# Altium PCB PCB2.PcbDoc
Units mil, origin at the board's own origin, x right, y up, seen from the top; angles counter-clockwise.
Board outline 6000 x 4000 mil, 2 copper layers (Top Layer, Bottom Layer); 42 components, 41 nets, 123 pads, 10 vias.
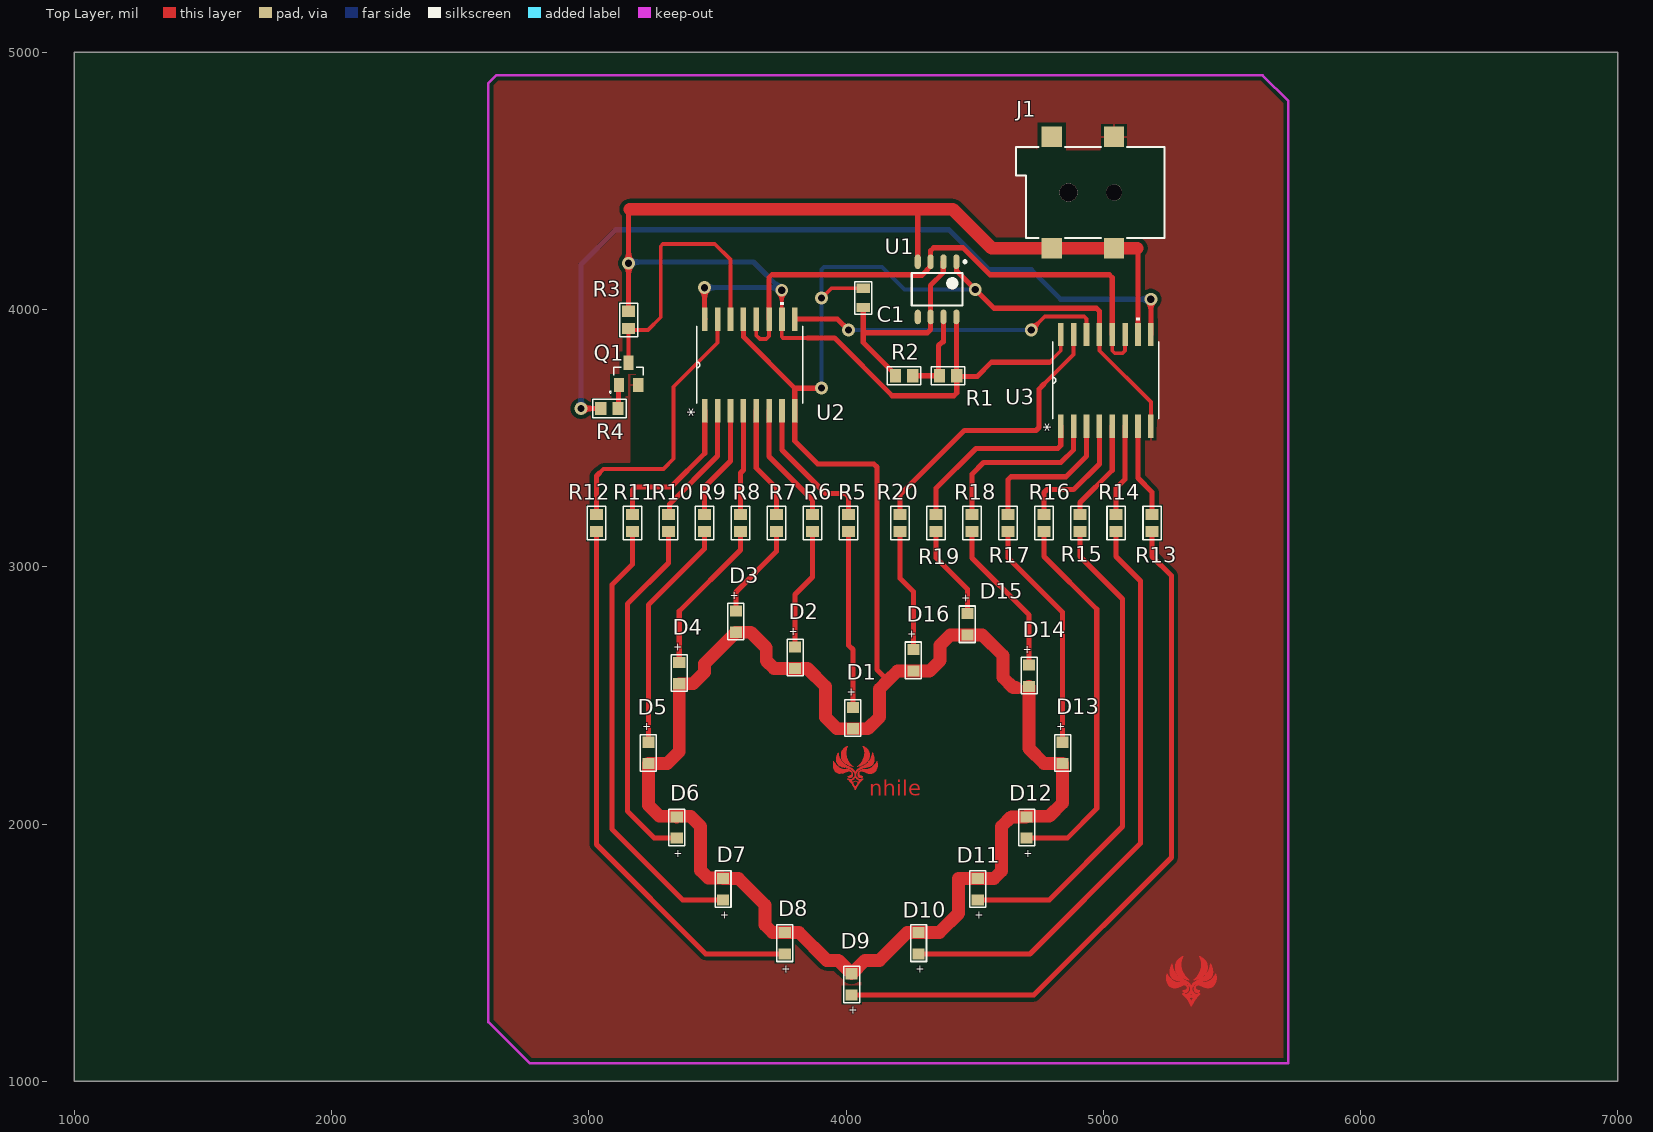
[diagram p0: Top Layer view]
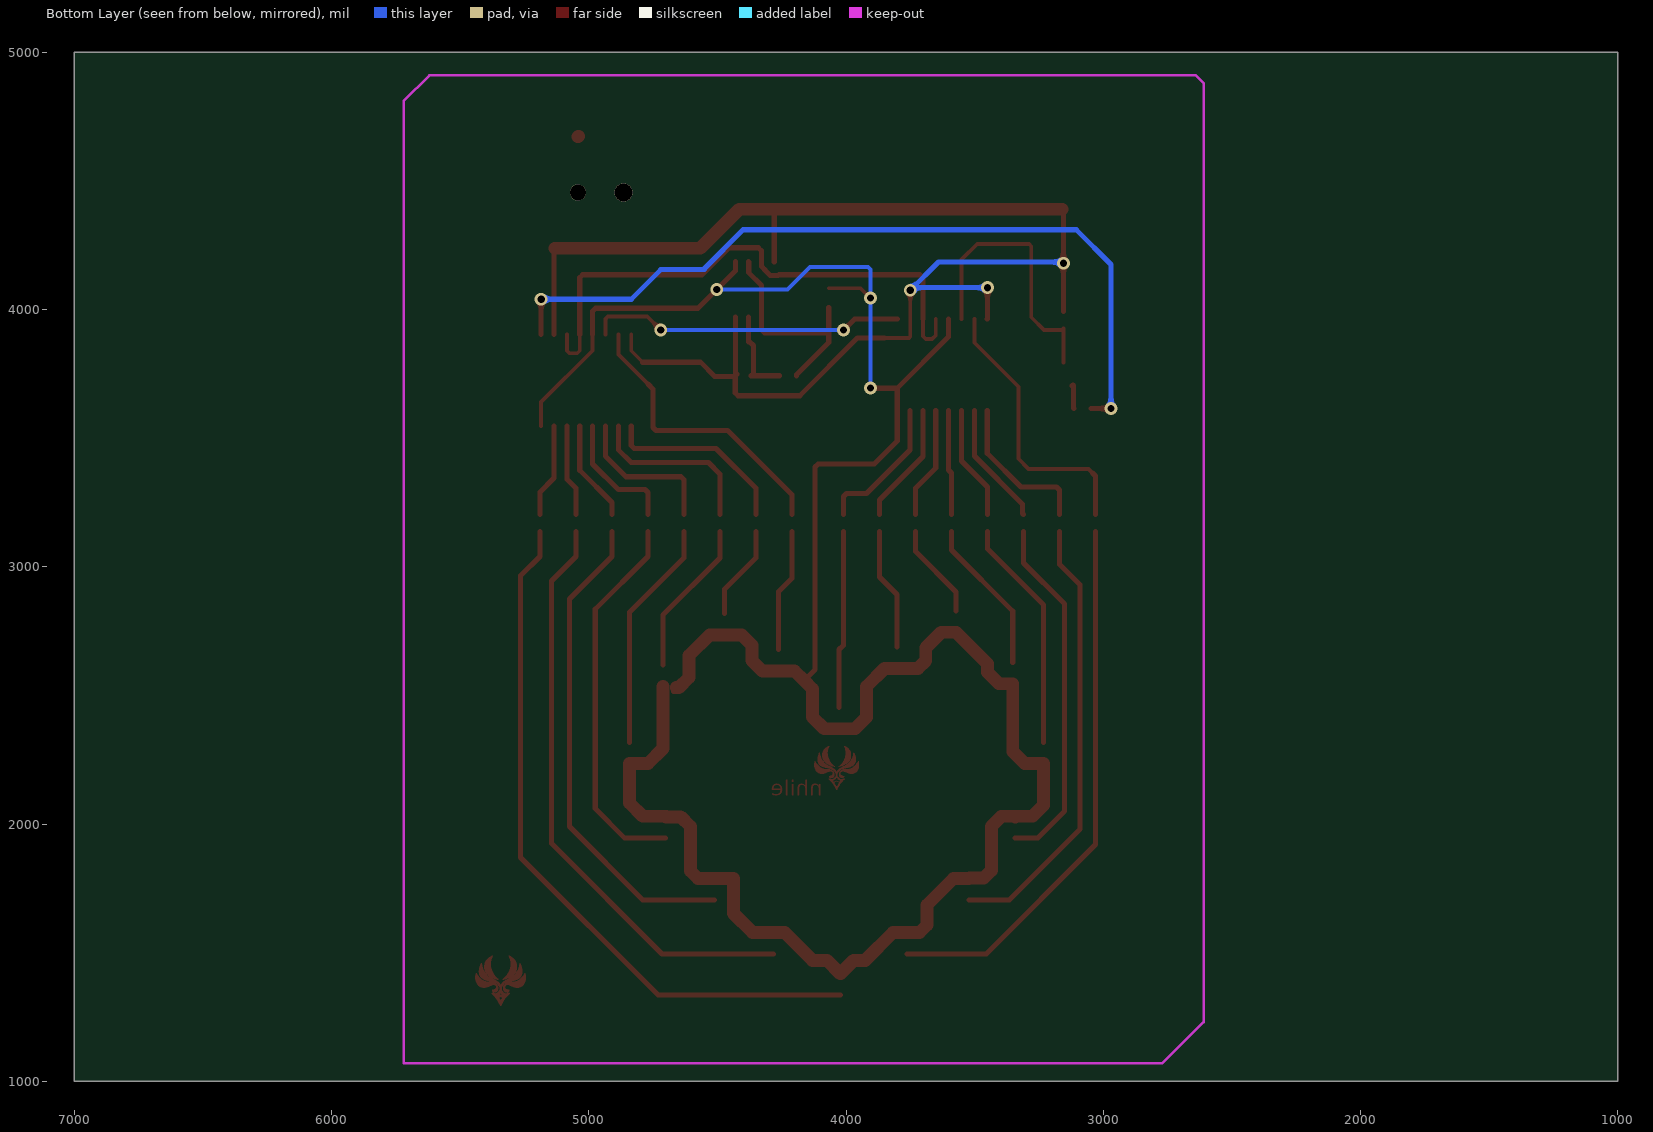
[diagram p1: Bottom Layer view, seen from below]
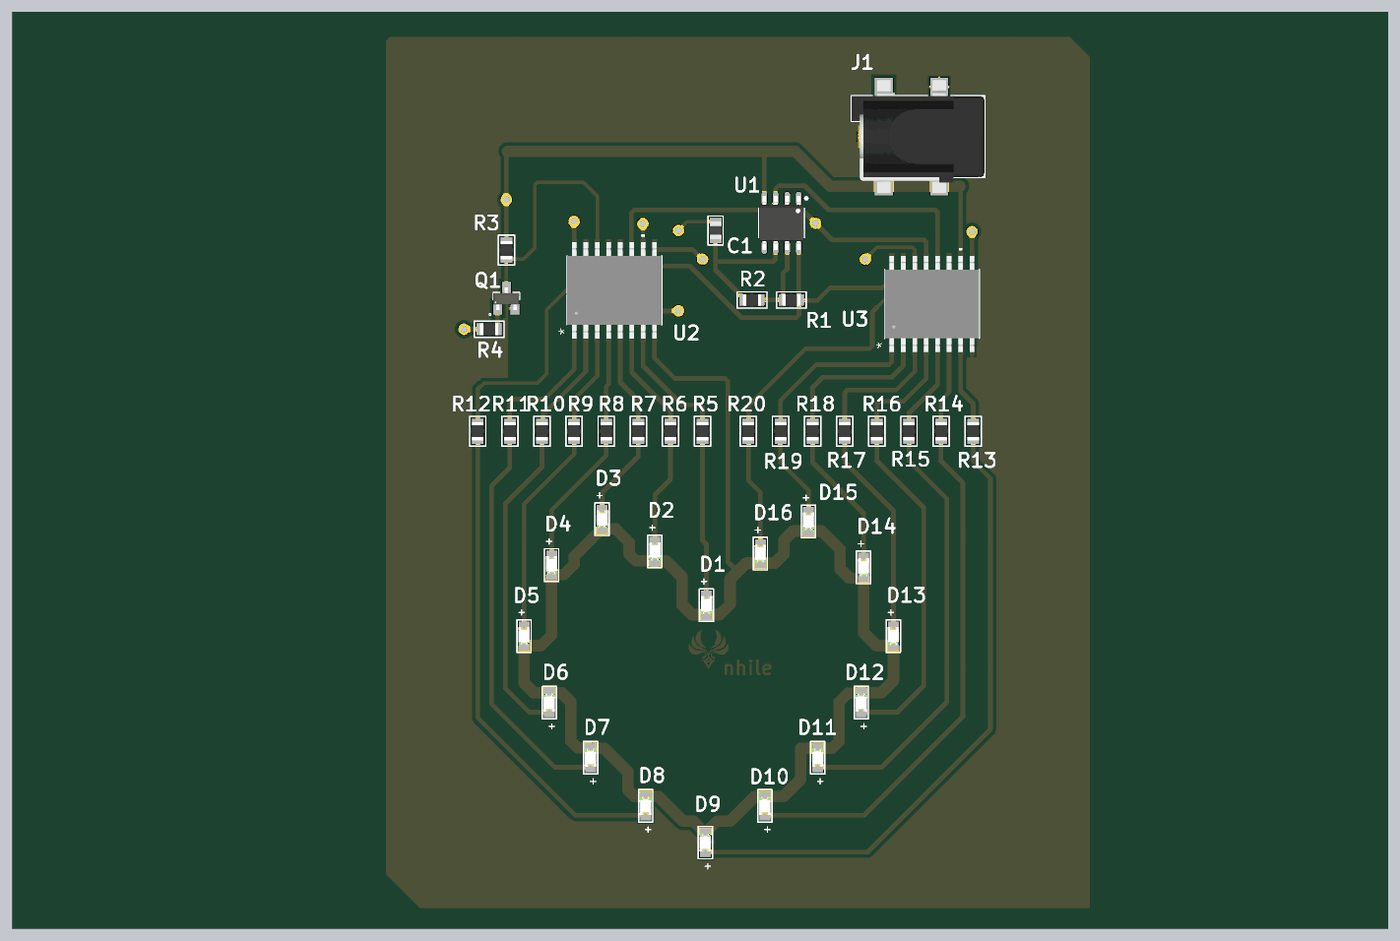
[diagram p2: 3D render of the assembled board from above, using the file's embedded part models]

## Layer stack, top to bottom
Top Solder: solder mask 0.4, Solder Resist, Dk 3.5
Top Layer: signal copper 1.4
Dielectric 1: dielectric 12.6, FR-4, Dk 4.8
Bottom Layer: signal copper 1.4
Bottom Solder: solder mask 0.4, Solder Resist, Dk 3.5

## Board outline
1000,1000 7000,1000 7000,5000 1000,5000

## Design rules (kind name [scope] priority, off if disabled: settings)
Clearance [All] p1: gap=15 ignorepadtopadclearanceinfootprint=FALSE
PolygonConnect [All] p1: connectstyle=Relief reliefconductorwidth=10 reliefentries=4 polygonreliefangle="90 Angle" airgapwidth=10
RoutingVias [All] p1: holewidth=0.8 width=1.5 viastyle="Through Hole" minholewidth=0.8 minwidth=1.5 maxholewidth=0.8 maxwidth=1.5
SolderMaskExpansion [All] p1: expansion=4 istentingtop=FALSE
Width [All] p1: maxlimit=50 minlimit=15 preferedwidth=20
30 further rules are at their usual default settings.

## Components (designator, comment, footprint, x,y, rotation, side; value= is the part's Value field where it differs from the comment)
C1 "10 uF, 25 VDC" CAP_0805 4066,4046.54 r90 top
D1 "Blue, 3.2V" WL-SMCW_0805 4027,2411.54 r90 top
D2 "Blue, 3.2V" WL-SMCW_0805 3802,2646.54 r90 top
D3 "Blue, 3.2V" WL-SMCW_0805 3572,2786.54 r90 top
D4 "Blue, 3.2V" WL-SMCW_0805 3352,2586.54 r90 top
D5 "Blue, 3.2V" WL-SMCW_0805 3232,2276.54 r90 top
D6 "Blue, 3.2V" WL-SMCW_0805 3342,1986.54 r270 top
D7 "Blue, 3.2V" WL-SMCW_0805 3522,1746.54 r270 top
D8 "Blue, 3.2V" WL-SMCW_0805 3762,1536.54 r270 top
D9 "Blue, 3.2V" WL-SMCW_0805 4022,1376.54 r270 top
D10 "Blue, 3.2V" WL-SMCW_0805 4282,1536.54 r270 top
D11 "Blue, 3.2V" WL-SMCW_0805 4512,1746.54 r270 top
D12 "Blue, 3.2V" WL-SMCW_0805 4702,1986.54 r270 top
D13 "Blue, 3.2V" WL-SMCW_0805 4842,2276.54 r90 top
D14 "Blue, 3.2V" WL-SMCW_0805 4712,2576.54 r90 top
D15 "Blue, 3.2V" WL-SMCW_0805 4472,2776.54 r90 top
D16 "Blue, 3.2V" WL-SMCW_0805 4262,2636.54 r90 top
J1 "DC050" DC050 4915,4455 r0 top
Q1 "MMBTA42" MMBT-SOT23 3155,3750 r0 top
R1 "1 KOhm, 1/8 W" RESISTOR_0805 4397,3742.54 r0 top
R2 "1 KOhm, 1/8 W" RESISTOR_0805 4226,3742.54 r0 top
R3 "1 MOhm, 1/8 W" RESISTOR_0805 3155,3960 r90 top
R4 "1 MOhm, 1/8 W" RESISTOR_0805 3080,3615 r180 top
R5 "1K, 1/8W" RESISTOR_0805 4010,3170 r270 top value="1 KOhm, 1/8 W"
R6 "1K, 1/8W" RESISTOR_0805 3870,3170 r90 top value="1 KOhm, 1/8 W"
R7 "1K, 1/8W" RESISTOR_0805 3730,3170 r90 top value="1 KOhm, 1/8 W"
R8 "1K, 1/8W" RESISTOR_0805 3590,3170 r90 top value="1 KOhm, 1/8 W"
R9 "1K, 1/8W" RESISTOR_0805 3450,3170 r90 top value="1 KOhm, 1/8 W"
R10 "1K, 1/8W" RESISTOR_0805 3310,3170 r90 top value="1 KOhm, 1/8 W"
R11 "1K, 1/8W" RESISTOR_0805 3170,3170 r90 top value="1 KOhm, 1/8 W"
R12 "1K, 1/8W" RESISTOR_0805 3030,3170 r90 top value="1 KOhm, 1/8 W"
R13 "1K, 1/8W" RESISTOR_0805 5190,3170 r90 top value="1 KOhm, 1/8 W"
R14 "1K, 1/8W" RESISTOR_0805 5050,3170 r90 top value="1 KOhm, 1/8 W"
R15 "1K, 1/8W" RESISTOR_0805 4910,3170 r90 top value="1 KOhm, 1/8 W"
R16 "1K, 1/8W" RESISTOR_0805 4770,3170 r90 top value="1 KOhm, 1/8 W"
R17 "1K, 1/8W" RESISTOR_0805 4630,3170 r90 top value="1 KOhm, 1/8 W"
R18 "1K, 1/8W" RESISTOR_0805 4490,3170 r90 top value="1 KOhm, 1/8 W"
R19 "1K, 1/8W" RESISTOR_0805 4350,3170 r90 top value="1 KOhm, 1/8 W"
R20 "1K, 1/8W" RESISTOR_0805 4210,3170 r90 top value="1 KOhm, 1/8 W"
U1 "LM555CMX" LM555CMX 4354,4078.54 r270 top
U2 "SN74HC595DWR" DW16 3626,3784.54 r90 top
U3 "SN74HC595DWR" DW16 5010,3725 r90 top

## Footprints (in the part's own frame and the unit in brackets; to place one, negate y for a bottom-side part, rotate by r counter-clockwise, add the part's x,y. Pads: shape width x height; smd on the part's side, far side on the other; paste and mask are expansions set on the pad)
CAP_0805 [mm]
  rect 0.9x1.3 smd: 1(-0.975,-0.025) 2(0.925,-0.025)
  silkscreen extent -1.63,-0.86 1.57,0.81, body extent -1.03,-0.65 0.97,0.6, height 0.6
DC050 [mm]
  rect 2x2 smd: 1(-2.92,-5.5) 1(3.23,-5.5) 2(3.23,5.5) 3(-2.92,5.5)
  round 1.6 hole 1.6 unplated: MH1(3.23,0)
  round 1.8 hole 1.8 unplated: MH2(-1.27,0)
  silkscreen extent -6.47,-4.5 8.23,4.5, body extent -6.47,-6.25 8.23,6.25, height 11.05
DW16 [mil]
  rect 91x22 smd paste-45.5 mask-45.5: 1(-178,175) 2(-178,125) 3(-178,75) 4(-178,25) 5(-178,-25) 6(-178,-75) 7(-178,-125) 8(-178,-175) 9(178,-175) 10(178,-125) 11(178,-75) 12(178,-25) 13(178,25) 14(178,75) 15(178,125) 16(178,175)
  silkscreen extent -150,-206 244,206, body extent -209,-206 209,206, height 104
LM555CMX [mm] "SOIC, 8-Leads, Body 4.91x3.90mm, Pitch 1.27mm, IPC Medium Density"
  oval 1.45x0.6 smd: 1(-2.725,1.905) 2(-2.725,0.635) 3(-2.725,-0.635) 4(-2.725,-1.905) 5(2.725,-1.905) 6(2.725,-0.635) 7(2.725,0.635) 8(2.725,1.905)
  silkscreen extent -2.85,-2.5 1.6,2.88, body extent -3,-2.5 3,2.5, height 1.35
MMBT-SOT23 [mm]
  rect 1x1.4 smd: 1(-0.95,-1.1) 2(0,1.1) 3(0.95,-1.1)
  silkscreen extent -1.9,-1.9 1.45,0.65, body extent -1.45,-1.3 1.45,1.2, height 1.1
RESISTOR_0805 [mm] "Chip Resistor, 2-Leads, Body 2,00x1,20mm, IPC Medium Density"
  rect 1.1x1.3 smd: 1(-0.85,0) 2(0.85,0)
  silkscreen extent -1.65,-0.9 1.65,0.9, body extent -1,-0.65 1,0.65, height 0.45
WL-SMCW_0805 [mm] "SMD Mono-color Chip LED, body 2.0x1.25mm"
  rect 1.1x1.2 smd: 1(-1.05,0) 2(1.05,0)
  silkscreen extent -1.8,-0.79 1.8,0.79, body extent -1,-0.63 1,0.62, height 0.7

## Part data
C1: library part 0108051061025, "CAP, size 0805, 10 uF, 25 VDC", Capacitance="10 uF", Manufacture Name=TDK, Manufacture SN=CGA4J1X7S1E106K125AE, Operating Temperature="-55 to +125degC", Tolerance=+/-10%, Voltage Rating DC="25 VDC", ComponentLink2Description=Datasheet, ComponentLink2URL=https://product.tdk.com/system/files/dam/doc/product/capacitor/ceramic/mlcc/catalog/mlcc_automotive_soft_en.pdf?ref_disty=mouser, Mounting Technology=SMT, Packaging="Tape and Reel", Size=0805, Supplier 1 Name=Mouser, Supplier 1 SN=810-CGA4J1X7S1E106K2, Supplier 1 URL=https://www.mouser.vn/ProductDetail/TDK/CGA4J1X7S1E106K125AE?qs=PqoDHHvF64%252BJvhmUzM2odA%3D%3D&utm_source=mouser-refine-download&utm_medium=file&utm_campaign=CGA4J1X7S1E106K125AE&utm_content=TDK, Supplier 2 Name=Digi-Key, Supplier 2 SN=445-181411-2-ND, Supplier 2 URL=https://www.digikey.com/en/products/detail/tdk-corporation/cga4j1x7s1e106k125ae/9744777, Supplier 3 Name=thegioiic, Supplier 3 SN=OEM, Supplier 3 URL=N/A
D1 D2 D3 D4 D5 D6 D7 D8 D9 D10 D11 D12 D13 D14 D15 D16: library part 160805BlueClear, "WL-SMCW SMT Mono-color Chip LED Waterclear, size 0805, Blue, 3.2V, 140deg", Color=Blue, ComponentLink1Description="Datasheet link", ComponentLink1URL=N/A, ComponentLink2Description="Supplier 1 URL", ComponentLink2URL=https://www.mouser.vn/ProductDetail/Wurth-Elektronik/150080BS75000?qs=2kOmHSv6VfT2tBo3UPVqAQ%3D%3D, ComponentLink3Description="Supplier 2 URL", ComponentLink3URL=https://www.digikey.com/en/products/detail/liteon/LTST-C170TBKT/388527, ComponentLink4Description="Supplier 3 URL", ComponentLink4URL=https://www.thegioiic.com/led-xanh-duong-0805-dan-smd-trong-suot-harvatek, Size=0603, Supplier 1 Name=Mouser, Supplier 1 SN=710-150080BS75000, Supplier 1 URL=https://www.mouser.vn/ProductDetail/Wurth-Elektronik/150080BS75000?qs=2kOmHSv6VfT2tBo3UPVqAQ%3D%3D, Supplier 2 Name=Digi-Key, Supplier 2 SN=160-1579-2-ND, Supplier 2 URL=https://www.digikey.com/en/products/detail/liteon/LTST-C170TBKT/388527, Supplier 3 Name=ICDayRoi, Supplier 3 SN=N/A, Supplier 3 URL=https://www.thegioiic.com/led-xanh-duong-0805-dan-smd-trong-suot-harvatek, Type=Clear
J1: Manufacturer=OEM, Manufacturer Part Number=N/A, Rated Current=2.5A, Working Voltage=16V, ComponentLink1Description="Datasheet link", ComponentLink1URL=N/A, ComponentLink2Description="Supplier 1 URL", ComponentLink2URL=N/A, ComponentLink3Description="Supplier 2 URL", ComponentLink3URL=N/A, ComponentLink4Description="Supplier 3 URL", ComponentLink4URL=https://www.thegioiic.com/dc050-dau-noi-nguon-dc-cai-5521-dan-smd-kim-2-1mm, Mount=SMD, Number of Pins=4, Operating Temperature Max=N/A, Operating Temperature Min=N/A, Orientation=N/A, Packaging=N/A, Supplier 1 Name=Mouser, Supplier 1 SN=N/A, Supplier 1 URL=N/A, Supplier 2 Name=Digi-Key, Supplier 2 SN=N/A, Supplier 2 URL=N/A, Supplier 3 Name=thegioiic, Supplier 3 SN=DC050, Supplier 3 URL=https://www.thegioiic.com/dc050-dau-noi-nguon-dc-cai-5521-dan-smd-kim-2-1mm
Q1: "TRANS NPN, 300V, 0.5A, SOT23-3", Current - Collector=500mA, DC Current Gain=80-200, Package=SOT-23, Power Dissipation=250mW, Voltage - Collector Emitter Breakdown=300V, Gain Bandwidth Product fT=50MHz, Supplier 1 Name=Mouser, Supplier 1 SN=637-MMBTA42, Supplier 1 URL=https://www.mouser.vn/ProductDetail/Diotec-Semiconductor/MMBTA42?qs=OlC7AqGiEDkTSphcOD18pw%3D%3D, Supplier 2 Name=Digi-Key, Supplier 2 SN=2796-MMBTA42TR-ND, Supplier 2 URL=https://www.digikey.com/en/products/detail/diotec-semiconductor/MMBTA42/13163233, Supplier 3 Name=thegioiic, Supplier 3 SN=N/A, Supplier 3 URL=https://www.thegioiic.com/mmbta42-transistor-npn-300v-0-5a-3-chan-sot-23, Transistor Type=NPN
R1 R2 R5 R6 R7 R8 R9 R10 R11 R12 R13 R14 R15 R16 R17 R18 R19 R20: library part 0008051021, "RES, size 0805, 1 KOhm, 1/8 W", Manufacture  Name="Vishay Dale", Manufacture  SN=M55342K06B1E00RS3, Rated Power="1/8 W", Resistance="1 KOhm", Resistance tolerance=+/-1%, ComponentLink1Description="Datasheet link", ComponentLink1URL=https://www.vishay.com/docs/31010/rcwpm.pdf, ComponentLink2Description="Supplier 1 URL", ComponentLink2URL=N/A, ComponentLink3Description="Supplier 2 URL", ComponentLink3URL=https://www.digikey.com/en/products/detail/vishay-dale/M55342K06B1E00RS3/2941798, ComponentLink4Description="Supplier 3 URL", ComponentLink4URL=https://www.thegioiic.com/dien-tro-1-kohm-0805-1, Mounting Technology=SMT, Size=0805, Supplier 1 Name=Mouser, Supplier 1 SN=N/A, Supplier 1 URL=N/A, Supplier 2 Name=Digi-Key, Supplier 2 SN=1135-1001-2-ND, Supplier 2 URL=https://www.digikey.com/en/products/detail/vishay-dale/M55342K06B1E00RS3/2941798, Supplier 3 Name=Thegioiic, Supplier 3 SN=N/A, Supplier 3 URL=https://www.thegioiic.com/dien-tro-1-kohm-0805-1
R3 R4: library part 0008051051, "RES, size 0805, 1 MOhm, 1/8 W", Manufacture  Name="Vishay Dale", Manufacture  SN=M55342K06B1F00RS3, Rated Power="1/8 W", Resistance="1 MOhm", Resistance tolerance=+/-1%, ComponentLink1Description="Datasheet link", ComponentLink1URL=N/A, ComponentLink2Description="Supplier 1 URL", ComponentLink2URL=N/A, ComponentLink3Description="Supplier 2 URL", ComponentLink3URL=https://www.digikey.com/en/products/detail/vishay-dale/M55342K06B1F00RS3/2941807?s=N4IgjCBcoMxaBjKAzAhgGwM4FMA0IB7KAbXDBggF18AHAFyhAGU6AnASwDsBzEAX3xgAbPBBJIaLHkIkQMAJwwATPJDUQ9Riw49%2B%2BACwjoYlBhz4ikUgA4A7MrW0GkZmy68BIJQAZrAVlFxSXMZK3AAAgBZAHkACwBbTEcNZxAAVU52OmjkSOxUTABXVmx%2BPj4gA, ComponentLink4Description="Supplier 3 URL", ComponentLink4URL=https://www.thegioiic.com/dien-tro-1-mohm-0805-1, Mounting Technology=SMT, Size=0805, Supplier 1 Name=Mouser, Supplier 1 SN=N/A, Supplier 1 URL=N/A, Supplier 2 Name=Digi-Key, Supplier 2 SN=1135-1009-2-ND, Supplier 2 URL=https://www.digikey.com/en/products/detail/vishay-dale/M55342K06B1F00RS3/2941807?s=N4IgjCBcoMxaBjKAzAhgGwM4FMA0IB7KAbXDBggF18AHAFyhAGU6AnASwDsBzEAX3xgAbPBBJIaLHkIkQMAJwwATPJDUQ9Riw49%2B%2BACwjoYlBhz4ikUgA4A7MrW0GkZmy68BIJQAZrAVlFxSXMZK3AAAgBZAHkACwBbTEcNZxAAVU52OmjkSOxUTABXVmx%2BPj4gA, Supplier 3 Name=Thegioiic, Supplier 3 SN=N/A, Supplier 3 URL=https://www.thegioiic.com/dien-tro-1-mohm-0805-1
U1: "Timers & Support Products TIMER", LCSC Part #=N/A, Manufacturer="Texas Instruments", Manufacturer Part Number=LM555CMX/NOPB, Operating Temperature Max="+ 85 C", Operating Temperature Min="- 40 C", Package / Case=SOIC-8, Power Dissipation="1.18 W", Supplier 1 Part Number=926-LM555CMX/NOPB, Supplier 3 Part Number=NE555D, Supply Voltage - Max="4.5 V", Supply Voltage - Min="16 V", Active=Active, ComponentLink1Description=Datasheet, ComponentLink1URL=https://www.ti.com/lit/gpn/lm555, Mount=SMD/SMT, Number of Internal Timers=1, Packaging="Tape and Reel", Pad count=8, Supplier 1=Mouser, Supplier 1 URL=https://www.mouser.com/ProductDetail/Texas-Instruments/LM555CMX-NOPB?qs=QbsRYf82W3GHnQuoL%2FmIoA%3D%3D, Supplier 2=Digi-Key, Supplier 2 Part Number=N/A, Supplier 2 URL=N/A, Supplier 3=thegioiic, Supplier 3 URL=https://www.thegioiic.com/ne555d-ic-timer-circuit-100khz-8-soic
U2 U3: "No Description Available", Mfr_Name="Texas Instruments", RefDes=RefDes, Type=Type

## Via types
v1: diameter 50, hole 28, Top Layer to Bottom Layer, 10 vias

## Nets (pads, with @x,y where several pads share a name; then routed paths per layer and width w, separated by ;. In a path a pad name is that pad's centre, name@x,y a point inside that pad or via, vN(x,y) a via of type N, cw(c..) or ccw(c..) an arc to the next point about the centre after c; other vN are vias at no path point)
1: R12.2 U2.15 | length 1090.8
  Top Layer w15: 3041.72,3365 3056.72,3380 3290,3380 3330,3420 3330,3700 3501,3871 U2.15
  Top Layer w20: R12.2 3030,3353.28 3041.72,3365
2: R11.2 U2.1 | length 600.5
  Top Layer w20: R11.2 3170,3298.28 3181.72,3310 3320,3310 3451,3441 U2.1
3: R10.2 U2.2 | length 482.2
  Top Layer w20: R10.2 3313.4,3206.87 3313.4,3243.4 3501,3431 U2.2
4: R9.2 U2.3 | length 444.9
  Top Layer w20: R9.2 3450,3310 3551,3411 U2.3
5: R8.2 U2.4 | length 407.6
  Top Layer w20: R8.2 3590,3365 3601,3376 U2.4
6: R7.2 U2.5 | length 435.8
  Top Layer w20: U2.5 3651,3384 3730,3305 R7.2
7: R6.2 U2.6 | length 473.1
  Top Layer w20: U2.6 3701,3429 3870,3260 R6.2
8: R5.1 U2.7 | length 556.2
  Top Layer w20: U2.7 3751,3454 3920,3285 3998.28,3285 4010,3273.28 R5.1
9: R20.2 U3.15 | length 1142.1
  Top Layer w15: 4770,3710 4885,3825 U3.15
  Top Layer w20: R20.2 4210,3280 4460,3530 4738.28,3530 4750,3541.72 4750,3690 4770,3710
10: R19.2 U3.1 | length 730.9
  Top Layer w20: R19.2 4350,3305 4505,3460 4823.28,3460 4835,3471.72 U3.1
11: R18.2 U3.2 | length 682.9
  Top Layer w20: R18.2 4490,3360 4535,3405 4835,3405 4885,3455 U3.2
12: R17.2 U3.3 | length 594.8
  Top Layer w20: R17.2 4630,3338.28 4641.72,3350 4855,3350 4935,3430 U3.3
13: R16.2 U3.4 | length 493.1
  Top Layer w20: R16.2 4770,3288.28 4781.72,3300 4885,3300 4985,3400 U3.4
14: R15.2 U3.5 | length 395.3
  Top Layer w20: R15.2 4910,3250 5035,3375 U3.5
15: R14.2 U3.6 | length 358
  Top Layer w20: R14.2 5050,3305 5085,3340 U3.6
16: R13.2 U3.7 | length 366.3
  Top Layer w20: U3.7 5135,3345 5190,3290 R13.2
555: U1.3 U2.11 U2.12 U3.11 U3.12 | length 2226
  Top Layer w15: U2.12 3651,3899 3665,3885 3690,3885 3701,3896 U2.11 ; U3.12 5035,3840 5045,3830 5075,3830 5085,3840 U3.11
  Top Layer w20: U2.11 3700,3963.54 3700,4123.28 3711.72,4135 4261.03,4135 4263.75,4132.28 4294.25,4132.28 4315.81,4153.84 4315.81,4154.92 4329,4168.11 U1.3 4329,4228.28 4340.72,4240 4455,4240 4560,4135 5023.28,4135 5035,4123.28 U3.12
GND: C1.2 D1.1 D2.1 D3.1 D4.1 D5.1 D6.1 D7.1 D8.1 D9.1 D10.1 D11.1 D12.1 D13.1 D14.1 D15.1 D16.1 J1.2 Q1.3 U1.1 U2.8 U2.13 U3.8 U3.13 | length 22524.5
  Top Layer w1: 5244,1399 5263,1399 ; 5244,1400 5262,1400 ; 5244,1401 5261,1401 ; 5244,1402 5260,1402 ; 5244,1403 5259,1403 ; 5244,1404 5258,1404 ; 5244,1405 5257,1405 ; 5244,1406 5256,1406 ; 5244,1407 5256,1407 ; 5244,1408 5255,1408 ; 5245,1393 5270,1393 ; 5245,1394 5268,1394 ; 5245,1395 5267,1395 ; 5245,1396 5266,1396 ; 5245,1397 5265,1397 ; 5245,1398 5264,1398 ; 5245,1409 5254,1409 ; 5245,1410 5253,1410 ; 5245,1411 5253,1411 ; 5245,1412 5252,1412 ; 5246,1389 5276,1389 ; 5246,1390 5274,1390 ; 5246,1391 5272,1391 ; 5246,1392 5271,1392 ; 5246,1413 5251,1413 ; 5246,1414 5251,1414 ; 5246,1415 5250,1415 ; 5246,1416 5249,1416 ; 5247,1386 5284,1386 ; 5247,1387 5281,1387 ; 5247,1388 5278,1388 ; 5247,1417 5249,1417 ; 5247,1418 5248,1418 ; 5248,1384 5309,1384 ; 5248,1385 5288,1385 ; 5249,1382 5315,1382 ; 5249,1383 5312,1383 ; 5250,1380 5320,1380 ; 5250,1381 5318,1381 ; 5251,1378 5323,1378 ; 5251,1379 5321,1379 ; 5252,1377 5324,1377 ; 5253,1376 5325,1376 ; 5254,1374 5310,1374 ; 5254,1375 5314,1375 ; 5255,1373 5308,1373 ; 5256,1372 5306,1372 ; 5257,1371 5304,1371 ; 5258,1423 5280,1423 ; 5258,1424 5279,1424 ; 5258,1425 5279,1425 ; 5258,1426 5278,1426 ; 5258,1427 5278,1427 ; 5258,1428 5277,1428 ; 5258,1429 5277,1429 ; 5259,1370 5301,1370 ; 5259,1418 5283,1418 ; 5259,1419 5283,1419 ; 5259,1420 5282,1420 ; 5259,1421 5281,1421 ; 5259,1422 5281,1422 ; 5259,1430 5276,1430 ; 5259,1431 5275,1431 ; 5259,1432 5275,1432 ; 5259,1433 5275,1433 ; 5259,1434 5274,1434 ; 5259,1435 5274,1435 ; 5259,1436 5273,1436 ; 5260,1369 5299,1369 ; 5260,1415 5286,1415 ; 5260,1416 5285,1416 ; 5260,1417 5284,1417 ; 5260,1437 5273,1437 ; 5260,1438 5273,1438 ; 5260,1439 5272,1439 ; 5260,1440 5272,1440 ; 5260,1441 5272,1441 ; 5261,1412 5288,1412 ; 5261,1413 5287,1413 ; 5261,1414 5286,1414 ; 5261,1442 5271,1442 ; 5261,1443 5271,1443 ; 5261,1444 5271,1444 ; 5262,1368 5296,1368 ; 5262,1410 5291,1410 ; 5262,1411 5289,1411 ; 5262,1445 5271,1445 ; 5262,1446 5270,1446 ; 5262,1447 5270,1447 ; 5263,1367 5294,1367 ; 5263,1409 5292,1409 ; 5263,1448 5270,1448 ; 5263,1449 5270,1449 ; 5264,1407 5295,1407 ; 5264,1408 5293,1408 ; 5264,1450 5270,1450 ; 5264,1451 5270,1451 ; 5265,1406 5296,1406 ; 5265,1452 5269,1452 ; 5265,1453 5269,1453 ; 5266,1366 5291,1366 ; 5266,1405 5298,1405 ; 5266,1454 5269,1454 ; 5266,1455 5269,1455 ; 5267,1403 5301,1403 ; 5267,1404 5299,1404 ; 5267,1456 5269,1456 ; 5267,1457 5269,1457 ; 5268,1365 5288,1365 ; 5268,1402 5302,1402 ; 5269,1401 5304,1401 ; 5271,1400 5306,1400 ; 5272,1364 5284,1364 ; 5272,1399 5308,1399 ; 5273,1398 5309,1398 ; 5275,1397 5311,1397 ; 5277,1396 5313,1396 ; 5278,1395 5315,1395 ; 5279,1440 5305,1440 ; 5279,1441 5305,1441 ; 5279,1442 5304,1442 ; 5279,1443 5304,1443 ; 5279,1444 5304,1444 ; 5279,1445 5304,1445 ; 5279,1446 5304,1446 ; 5279,1447 5304,1447 ; 5279,1448 5303,1448 ; 5279,1449 5303,1449 ; 5280,1394 5317,1394 ; 5280,1434 5307,1434 ; 5280,1435 5306,1435 ; 5280,1436 5306,1436 ; 5280,1437 5306,1437 ; 5280,1438 5305,1438 ; 5280,1439 5305,1439 ; 5280,1450 5303,1450 ; 5280,1451 5303,1451 ; 5280,1452 5303,1452 ; 5280,1453 5303,1453 ; 5280,1454 5303,1454 ; 5281,1431 5307,1431 ; 5281,1432 5307,1432 ; 5281,1433 5307,1433 ; 5281,1455 5303,1455 ; 5281,1456 5303,1456 ; 5281,1457 5303,1457 ; 5282,1428 5309,1428 ; 5282,1429 5308,1429 ; 5282,1430 5308,1430 ; 5282,1458 5303,1458 ; 5282,1459 5303,1459 ; 5282,1460 5303,1460 ; 5283,1393 5319,1393 ; 5283,1426 5309,1426 ; 5283,1427 5309,1427 ; 5283,1461 5303,1461 ; 5283,1462 5303,1462 ; 5284,1424 5310,1424 ; 5284,1425 5310,1425 ; 5284,1463 5303,1463 ; 5284,1464 5304,1464 ; 5285,1392 5321,1392 ; 5285,1423 5311,1423 ; 5285,1465 5304,1465 ; 5285,1466 5304,1466 ; 5286,1421 5312,1421 ; 5286,1422 5311,1422 ; 5286,1467 5304,1467 ; 5286,1468 5304,1468 ; 5287,1420 5312,1420 ; 5287,1469 5305,1469 ; 5288,1418 5313,1418 ; 5288,1419 5313,1419 ; 5288,1470 5305,1470 ; 5289,1391 5323,1391 ; 5289,1417 5314,1417 ; 5289,1471 5305,1471 ; 5290,1416 5314,1416 ; 5290,1472 5305,1472 ; 5291,1415 5315,1415 ; 5291,1473 5306,1473 ; 5292,1414 5316,1414 ; 5292,1474 5306,1474 ; 5293,1413 5316,1413 ; 5293,1475 5306,1475 ; 5294,1390 5324,1390 ; 5294,1412 5317,1412 ; 5294,1476 5307,1476 ; 5295,1411 5318,1411 ; 5295,1477 5307,1477 ; 5296,1410 5318,1410 ; 5296,1478 5308,1478 ; 5298,1409 5319,1409 ; 5298,1479 5308,1479 ; 5299,1408 5320,1408 ; 5299,1480 5308,1480 ; 5300,1389 5326,1389 ; 5300,1481 5309,1481 ; 5301,1407 5321,1407 ; 5302,1482 5309,1482 ; 5303,1406 5322,1406 ; 5304,1405 5323,1405 ; 5304,1483 5310,1483 ; 5306,1388 5327,1388 ; 5306,1404 5324,1404 ; 5306,1484 5310,1484 ; 5307,1341 5318,1341 ; 5308,1340 5319,1340 ; 5308,1403 5325,1403 ; 5308,1485 5311,1485 ; 5309,1339 5339,1339 ; 5309,1342 5316,1342 ; 5310,1338 5338,1338 ; 5310,1349 5328,1349 ; 5310,1350 5329,1350 ; 5310,1351 5330,1351 ; 5310,1352 5330,1352 ; 5310,1353 5331,1353 ; 5310,1354 5331,1354 ; 5310,1387 5329,1387 ; 5310,1402 5326,1402 ; 5311,1337 5337,1337 ; 5311,1348 5327,1348 ; 5312,1336 5336,1336 ; 5312,1347 5326,1347 ; 5313,1335 5335,1335 ; 5313,1401 5327,1401 ; 5314,1334 5333,1334 ; 5314,1346 5325,1346 ; 5314,1386 5330,1386 ; 5315,1333 5331,1333 ; 5315,1400 5328,1400 ; 5316,1332 5369,1332 ; 5317,1331 5368,1331 ; 5317,1345 5322,1345 ; 5317,1355 5332,1355 ; 5317,1375 5327,1375 ; 5317,1385 5331,1385 ; 5318,1330 5367,1330 ; 5318,1399 5329,1399 ; 5319,1329 5366,1329 ; 5319,1384 5333,1384 ; 5320,1328 5341,1328 ; 5320,1356 5332,1356 ; 5320,1374 5328,1374 ; 5321,1327 5340,1327 ; 5321,1383 5334,1383 ; 5321,1398 5330,1398 ; 5322,1326 5339,1326 ; 5322,1357 5332,1357 ; 5322,1373 5328,1373 ; 5323,1324 5335,1324 ; 5323,1325 5337,1325 ; 5323,1358 5333,1358 ; 5323,1372 5329,1372 ; 5323,1382 5335,1382 ; 5323,1397 5332,1397 ; 5324,1323 5335,1323 ; 5324,1340 5340,1340 ; 5324,1359 5333,1359 ; 5324,1370 5330,1370 ; 5324,1371 5330,1371 ; 5325,1322 5336,1322 ; 5325,1360 5333,1360 ; 5325,1361 5333,1361 ; 5325,1368 5331,1368 ; 5325,1369 5331,1369 ; 5325,1381 5336,1381 ; 5326,1320 5337,1320 ; 5326,1321 5337,1321 ; 5326,1362 5333,1362 ; 5326,1363 5333,1363 ; 5326,1364 5333,1364 ; 5326,1365 5332,1365 ; 5326,1366 5332,1366 ; 5326,1367 5332,1367 ; 5326,1380 5337,1380 ; 5326,1396 5333,1396 ; 5327,1319 5338,1319 ; 5327,1341 5341,1341 ; 5328,1317 5339,1317 ; 5328,1318 5338,1318 ; 5328,1379 5338,1379 ; 5329,1316 5340,1316 ; 5329,1342 5342,1342 ; 5329,1378 5338,1378 ; 5330,1314 5341,1314 ; 5330,1315 5340,1315 ; 5330,1343 5342,1343 ; 5330,1377 5339,1377 ; 5330,1395 5334,1395 ; 5331,1312 5342,1312 ; 5331,1313 5341,1313 ; 5331,1376 5340,1376 ; 5332,1311 5342,1311 ; 5332,1344 5342,1344 ; 5332,1375 5341,1375 ; 5333,1309 5352,1309 ; 5333,1310 5352,1310 ; 5333,1345 5352,1345 ; 5333,1374 5341,1374 ; 5333,1394 5334,1394 ; 5334,1307 5351,1307 ; 5334,1308 5351,1308 ; 5334,1346 5351,1346 ; 5334,1373 5342,1373 ; 5335,1305 5350,1305 ; 5335,1306 5350,1306 ; 5335,1347 5350,1347 ; 5335,1371 5342,1371 ; 5335,1372 5342,1372 ; 5336,1303 5349,1303 ; 5336,1304 5349,1304 ; 5336,1348 5349,1348 ; 5336,1349 5349,1349 ; 5336,1369 5349,1369 ; 5336,1370 5349,1370 ; 5337,1302 5348,1302 ; 5337,1333 5348,1333 ; 5337,1350 5348,1350 ; 5337,1367 5348,1367 ; 5337,1368 5348,1368 ; 5338,1300 5347,1300 ; 5338,1301 5347,1301 ; 5338,1351 5348,1351 ; 5338,1352 5347,1352 ; 5338,1353 5347,1353 ; 5338,1364 5347,1364 ; 5338,1365 5347,1365 ; 5338,1366 5347,1366 ; 5339,1298 5346,1298 ; 5339,1299 5346,1299 ; 5339,1334 5346,1334 ; 5339,1354 5347,1354 ; 5339,1355 5346,1355 ; 5339,1356 5346,1356 ; 5339,1357 5346,1357 ; 5339,1358 5346,1358 ; 5339,1359 5346,1359 ; 5339,1360 5346,1360 ; 5339,1361 5346,1361 ; 5339,1362 5346,1362 ; 5339,1363 5346,1363 ; 5340,1296 5345,1296 ; 5340,1297 5345,1297 ; 5341,1294 5344,1294 ; 5341,1295 5344,1295 ; 5341,1335 5344,1335 ; 5342,1293 5343,1293 ; 5342,1336 5343,1336 ; 5343,1311 5353,1311 ; 5343,1312 5354,1312 ; 5343,1328 5365,1328 ; 5343,1342 5356,1342 ; 5343,1343 5355,1343 ; 5343,1344 5353,1344 ; 5343,1371 5350,1371 ; 5343,1372 5351,1372 ; 5343,1373 5351,1373 ; 5344,1313 5354,1313 ; 5344,1314 5355,1314 ; 5344,1341 5358,1341 ; 5344,1374 5352,1374 ; 5344,1375 5353,1375 ; 5345,1315 5355,1315 ; 5345,1316 5356,1316 ; 5345,1327 5364,1327 ; 5345,1340 5361,1340 ; 5345,1376 5354,1376 ; 5346,1317 5357,1317 ; 5346,1318 5357,1318 ; 5346,1326 5363,1326 ; 5346,1339 5376,1339 ; 5346,1377 5355,1377 ; 5347,1319 5358,1319 ; 5347,1338 5375,1338 ; 5347,1378 5356,1378 ; 5347,1379 5357,1379 ; 5348,1320 5359,1320 ; 5348,1321 5359,1321 ; 5348,1325 5363,1325 ; 5348,1337 5374,1337 ; 5348,1380 5359,1380 ; 5349,1322 5360,1322 ; 5349,1336 5373,1336 ; 5349,1381 5360,1381 ; 5350,1323 5361,1323 ; 5350,1324 5362,1324 ; 5350,1335 5372,1335 ; 5350,1382 5362,1382 ; 5351,1383 5364,1383 ; 5351,1394 5352,1394 ; 5351,1395 5355,1395 ; 5352,1334 5371,1334 ; 5352,1358 5361,1358 ; 5352,1359 5361,1359 ; 5352,1360 5360,1360 ; 5352,1361 5360,1361 ; 5352,1362 5359,1362 ; 5352,1363 5359,1363 ; 5352,1384 5366,1384 ; 5352,1396 5358,1396 ; 5353,1354 5375,1354 ; 5353,1355 5368,1355 ; 5353,1356 5365,1356 ; 5353,1357 5363,1357 ; 5353,1364 5359,1364 ; 5353,1365 5359,1365 ; 5353,1366 5359,1366 ; 5353,1367 5359,1367 ; 5354,1333 5370,1333 ; 5354,1352 5375,1352 ; 5354,1353 5375,1353 ; 5354,1368 5359,1368 ; 5354,1369 5360,1369 ; 5354,1385 5369,1385 ; 5354,1397 5361,1397 ; 5355,1351 5375,1351 ; 5355,1370 5360,1370 ; 5355,1371 5361,1371 ; 5355,1386 5372,1386 ; 5355,1398 5365,1398 ; 5356,1350 5375,1350 ; 5356,1372 5362,1372 ; 5356,1387 5376,1387 ; 5356,1399 5367,1399 ; 5357,1349 5374,1349 ; 5357,1373 5363,1373 ; 5357,1374 5365,1374 ; 5357,1388 5380,1388 ; 5357,1400 5370,1400 ; 5358,1348 5374,1348 ; 5358,1375 5369,1375 ; 5358,1401 5373,1401 ; 5359,1347 5373,1347 ; 5359,1376 5432,1376 ; 5359,1389 5386,1389 ; 5359,1402 5375,1402 ; 5360,1346 5371,1346 ; 5360,1403 5377,1403 ; 5361,1377 5433,1377 ; 5361,1390 5391,1390 ; 5361,1404 5379,1404 ; 5362,1378 5434,1378 ; 5362,1391 5396,1391 ; 5362,1405 5381,1405 ; 5363,1345 5369,1345 ; 5363,1406 5383,1406 ; 5364,1379 5434,1379 ; 5364,1392 5399,1392 ; 5364,1407 5384,1407 ; 5365,1380 5435,1380 ; 5365,1408 5386,1408 ; 5366,1340 5377,1340 ; 5366,1393 5402,1393 ; 5366,1409 5387,1409 ; 5366,1410 5388,1410 ; 5367,1341 5378,1341 ; 5367,1381 5435,1381 ; 5367,1411 5390,1411 ; 5368,1394 5404,1394 ; 5368,1412 5391,1412 ; 5369,1342 5376,1342 ; 5369,1413 5392,1413 ; 5369,1414 5393,1414 ; 5370,1375 5431,1375 ; 5370,1382 5436,1382 ; 5370,1395 5406,1395 ; 5370,1415 5394,1415 ; 5371,1416 5395,1416 ; 5371,1417 5396,1417 ; 5372,1396 5408,1396 ; 5372,1418 5397,1418 ; 5372,1419 5398,1419 ; 5373,1383 5436,1383 ; 5373,1420 5398,1420 ; 5373,1421 5399,1421 ; 5374,1397 5410,1397 ; 5374,1422 5400,1422 ; 5374,1423 5400,1423 ; 5374,1485 5377,1485 ; 5375,1374 5430,1374 ; 5375,1424 5401,1424 ; 5375,1425 5401,1425 ; 5375,1483 5381,1483 ; 5375,1484 5379,1484 ; 5376,1398 5412,1398 ; 5376,1426 5402,1426 ; 5376,1427 5402,1427 ; 5376,1481 5384,1481 ; 5376,1482 5382,1482 ; 5377,1373 5430,1373 ; 5377,1384 5437,1384 ; 5377,1428 5403,1428 ; 5377,1429 5403,1429 ; 5377,1430 5404,1430 ; 5377,1479 5387,1479 ; 5377,1480 5386,1480 ; 5378,1399 5413,1399 ; 5378,1431 5404,1431 ; 5378,1432 5404,1432 ; 5378,1433 5405,1433 ; 5378,1476 5391,1476 ; 5378,1477 5390,1477 ; 5378,1478 5389,1478 ; 5379,1372 5429,1372 ; 5379,1434 5405,1434 ; 5379,1435 5405,1435 ; 5379,1436 5405,1436 ; 5379,1473 5394,1473 ; 5379,1474 5393,1474 ; 5379,1475 5392,1475 ; 5380,1400 5414,1400 ; 5380,1437 5405,1437 ; 5380,1438 5406,1438 ; 5380,1439 5406,1439 ; 5380,1440 5406,1440 ; 5380,1469 5398,1469 ; 5380,1470 5397,1470 ; 5380,1471 5396,1471 ; 5380,1472 5395,1472 ; 5381,1401 5416,1401 ; 5381,1441 5406,1441 ; 5381,1442 5406,1442 ; 5381,1443 5406,1443 ; 5381,1444 5406,1444 ; 5381,1445 5406,1445 ; 5381,1446 5406,1446 ; 5381,1447 5406,1447 ; 5381,1464 5401,1464 ; 5381,1465 5400,1465 ; 5381,1466 5400,1466 ; 5381,1467 5399,1467 ; 5381,1468 5399,1468 ; 5382,1371 5427,1371 ; 5382,1448 5406,1448 ; 5382,1449 5406,1449 ; 5382,1450 5405,1450 ; 5382,1451 5405,1451 ; 5382,1452 5405,1452 ; 5382,1453 5405,1453 ; 5382,1454 5405,1454 ; 5382,1455 5405,1455 ; 5382,1456 5404,1456 ; 5382,1457 5404,1457 ; 5382,1458 5404,1458 ; 5382,1459 5403,1459 ; 5382,1460 5403,1460 ; 5382,1461 5402,1461 ; 5382,1462 5402,1462 ; 5382,1463 5401,1463 ; 5383,1402 5417,1402 ; 5384,1370 5426,1370 ; 5385,1403 5418,1403 ; 5386,1369 5425,1369 ; 5387,1404 5419,1404 ; 5388,1405 5419,1405 ; 5389,1368 5424,1368 ; 5390,1406 5420,1406 ; 5391,1367 5422,1367 ; 5391,1407 5421,1407 ; 5392,1408 5422,1408 ; 5393,1409 5422,1409 ; 5394,1366 5419,1366 ; 5394,1410 5423,1410 ; 5396,1411 5423,1411 ; 5397,1365 5417,1365 ; 5397,1385 5437,1385 ; 5397,1412 5424,1412 ; 5397,1413 5424,1413 ; 5398,1414 5425,1414 ; 5399,1415 5425,1415 ; 5400,1416 5425,1416 ; 5401,1386 5438,1386 ; 5401,1417 5426,1417 ; 5402,1364 5413,1364 ; 5402,1418 5426,1418 ; 5402,1419 5426,1419 ; 5403,1420 5426,1420 ; 5404,1421 5426,1421 ; 5404,1422 5426,1422 ; 5405,1387 5438,1387 ; 5405,1423 5426,1423 ; 5406,1424 5427,1424 ; 5406,1425 5427,1425 ; 5407,1388 5438,1388 ; 5407,1426 5427,1426 ; 5408,1427 5427,1427 ; 5408,1428 5426,1428 ; 5409,1389 5439,1389 ; 5409,1429 5426,1429 ; 5409,1430 5426,1430 ; 5410,1431 5426,1431 ; 5410,1432 5426,1432 ; 5411,1390 5439,1390 ; 5411,1433 5426,1433 ; 5411,1434 5426,1434 ; 5411,1435 5426,1435 ; 5412,1436 5425,1436 ; 5412,1437 5425,1437 ; 5412,1438 5425,1438 ; 5413,1391 5439,1391 ; 5413,1439 5425,1439 ; 5413,1440 5425,1440 ; 5413,1441 5424,1441 ; 5414,1392 5440,1392 ; 5414,1442 5424,1442 ; 5414,1443 5424,1443 ; 5414,1444 5423,1444 ; 5414,1445 5423,1445 ; 5415,1446 5423,1446 ; 5415,1447 5422,1447 ; 5415,1448 5422,1448 ; 5415,1449 5422,1449 ; 5415,1450 5421,1450 ; 5416,1393 5440,1393 ; 5416,1451 5421,1451 ; 5416,1452 5420,1452 ; 5416,1453 5420,1453 ; 5416,1454 5419,1454 ; 5416,1455 5419,1455 ; 5416,1456 5418,1456 ; 5417,1394 5440,1394 ; 5417,1457 5418,1457 ; 5418,1395 5440,1395 ; 5419,1396 5440,1396 ; 5421,1397 5441,1397 ; 5422,1398 5441,1398 ; 5423,1399 5441,1399 ; 5424,1400 5441,1400 ; 5424,1401 5441,1401 ; 5425,1402 5441,1402 ; 5426,1403 5441,1403 ; 5427,1404 5441,1404 ; 5428,1405 5441,1405 ; 5428,1406 5441,1406 ; 5429,1407 5441,1407 ; 5430,1408 5441,1408 ; 5431,1409 5440,1409 ; 5431,1410 5440,1410 ; 5432,1411 5440,1411 ; 5433,1412 5440,1412 ; 5434,1413 5440,1413 ; 5434,1414 5439,1414 ; 5435,1415 5439,1415 ; 5436,1416 5439,1416 ; 5436,1417 5438,1417 ; 5437,1418 5438,1418
  Top Layer w15: v1(3905,4045) 3942.94,4082.94 C1.2 ; U3.13 4985,3840 5185,3640 U3.8
  Top Layer w20: U2.13 3601,3894 3801,3694 ; v1(3905,3695) 3904,3694 3801,3694 ; 4162.5,2557.5 4120,2600 4120,3388.28 4108.28,3400 3890,3400 3801,3489 U2.8 3801,3694 ; U1.1 4429.52,4185.3 4429.52,4150.48 4575,4005 4973.28,4005 4985,3993.28 U3.13 ; 4660,2515 4670,2515
  Top Layer w50: 4660,2530 4650,2530 4610,2570 4610,2655 4529.8,2735.2 D15.1 4405.2,2735.2 4365,2695 4365,2635 4325.2,2595.2 D16.1 4200.2,2595.2 4162.5,2557.5 4130,2525 4130,2415.39 4084.8,2370.2 D1.1 3964.8,2370.2 3920,2415 3920,2535 3849.8,2605.2 D2.1 3719.8,2605.2 3690,2635 3690,2685 3629.8,2745.2 D3.1 3450,2623.2 3450,2590 3405.2,2545.2 D4.1 3352,2282 3305,2235 3232.2,2235 D5.1 3232,2073 3275,2030 3339.87,2030 D6.1 3344.13,2030 3395,2030 3435,1990 3435,1819.29 3464.29,1790 3519.87,1790 D7.1 3582.13,1787.87 3685,1685 3685,1607.16 3714.29,1577.87 D8.1 3817.13,1577.87 3925,1470 3969.87,1470 D9.1 4074.13,1470 4130,1470 4237.87,1577.87 D10.1 4362.87,1577.87 4437.87,1652.87 4437.87,1787.87 D11.1 4575.71,1787.87 4605,1817.16 4605,1990 4642.87,2027.87 D12.1@4700,2027.87 ; D12.1@4700,2029.87 4789.87,2029.87 4842,2082 D13.1 4841.8,2235 4770,2235 4712,2293 D14.1 ; J1.2@5040,4673.7 J1.2
  Bottom Layer w15: v1(3905,3695) v1(3905,4045) 3905,4156.21 3913.79,4165 4140,4165 4227.26,4077.74 v1(4502.26,4077.74)
NetC1_1: C1.1 R2.1 U1.2 U1.6 | length 886
  Top Layer w15: U1.2@4379,4169.09 U1.2
  Top Layer w20: C1.1 4067,3910 ; R2.1 4192.54,3746.47 4067,3872.01 4067,3910 ; U1.2 4378.31,4185.13 4378.31,4143.31 4329,4094 U1.6 4329,3921.72 4317.28,3910 4067,3910
NetD1_2: D1.2 R5.2 | length 690.7
  Top Layer w20: R5.2 4010,2695 4027,2678 D1.2
NetD2_2: D2.2 R6.1 | length 476.8
  Top Layer w20: D2.2 3802,2892 3870,2960 R6.1
NetD3_2: D3.2 R7.1 | length 374.1
  Top Layer w20: D3.2 3572,2902 3730,3060 R7.1
NetD4_2: D4.2 R8.1 | length 607.2
  Top Layer w20: D4.2 3352,2827 3590,3065 R8.1
NetD5_2: D5.2 R9.1 | length 909
  Top Layer w20: D5.2 3232,2852 3450,3070 R9.1
NetD6_2: D6.2 R10.1 | length 1388.2
  Top Layer w20: R10.1 3310,3015 3150,2855 3150,2050 3254.8,1945.2 D6.2
NetD7_2: D7.2 R11.1 | length 1735.5
  Top Layer w20: R11.1 3170,3010 3090,2930 3090,1980 3364.8,1705.2 D7.2
NetD8_2: D8.2 R12.1 | length 2124.7
  Top Layer w20: R12.1 3030,1920 3455,1495 3761.8,1495 D8.2
NetD9_2: D9.2 R13.1 | length 2762.3
  Top Layer w20: D9.2 4022.2,1335 4730,1335 5265,1870 5265,2965 5190,3040 R13.1
NetD10_2: D10.2 R14.1 | length 2292.1
  Top Layer w20: D10.2 4282.2,1495 4715,1495 5145,1925 5145,2945 5050,3040 R14.1
NetD11_2: D11.2 R15.1 | length 1896
  Top Layer w20: D11.2 4512.2,1705 4790,1705 5075,1990 5075,2875 4910,3040 R15.1
NetD12_2: D12.2 R16.1 | length 1482.2
  Top Layer w20: D12.2 4702.2,1945 4860,1945 4975,2060 4975,2835 4770,3040 R16.1
NetD13_2: D13.2 R17.1 | length 906.5
  Top Layer w20: R17.1 4630,3035 4842,2823 D13.2
NetD14_2: D14.2 R18.1 | length 610.6
  Top Layer w20: R18.1 4490,3034 4712,2812 D14.2
NetD15_2: D15.2 R19.1 | length 369.2
  Top Layer w20: R19.1 4350,3035 4472,2913 D15.2
NetD16_2: D16.2 R20.1 | length 480.2
  Top Layer w20: R20.1 4210,2955 4262,2903 D16.2
NetQ1_1: Q1.1 R4.1 | length 97.6
  Top Layer w20: R4.1 3115.53,3617.07 3115.53,3704.63 Q1.1 Q1.1@3120.53,3703.76
NetQ1_2: Q1.2 R3.1 U2.14 | length 1089.2
  Top Layer w15: Q1.2 R3.1 3161.54,3920 3230,3920 3280,3970 3280,4246.21 3288.79,4255 3490,4255 3551,4194 U2.14
NetR1_1: R1.1 R2.2 U1.7 | length 345.1
  Top Layer w20: R2.2 R1.1@4368.54,3742.54 ; R1.1 4360,3746.07 4360,3860 4374,3874 ; 4379,3874 U1.7
NetR4_2: R4.2 U3.9 | length 3159.2
  Top Layer w20: v1(2970,3615) R4.2 ; U3.9 v1(5185,4040)
  Bottom Layer w20: v1(2970,3615) 2970,4175 3105,4310 4400,4310 4550,4160 4550,4155 4720,4155 4835,4040 v1(5185,4040)
NetU2_9: U2.9 U3.14 | length 1237.7
  Top Layer w15: v1(4720,3920) 4772.5,3972.5 4926.21,3972.5 4935,3963.71 U3.14
  Top Layer w20: U2.9 3967.46,3962.54 v1(4010,3920)
  Bottom Layer w15: v1(4010,3920) v1(4720,3920)
VCC: J1.1 R1.2 R3.2 U1.4 U1.8 U2.10 U2.16 U3.10 U3.16 | length 5817.5
  Top Layer w15: v1(3750,4075) 3750.5,4074.5 3750.5,3962.04 3750,3961.54 3750,3895 3755,3890 3850,3890 ; 4790,3795 4835,3840 U3.16
  Top Layer w20: R3.2 3155,4385 3160,4390 ; v1(3450,4085) 3450.5,4084.5 3450.5,3963.04 U2.16 ; 3850,3890 3955,3890 4180,3665 4418.75,3665 4430.46,3676.72 R1.2 ; U1.4 4279,4389 4280,4390 ; R1.2@4424.69,3748.31 R1.2 ; U1.8 4429.69,3970.56 R1.2@4429.69,3748.31 ; 4790,3795 4565,3795 4510,3740 4433,3740 R1.2 ; 5131.85,4238.46 5135,4235.31 U3.10
  Top Layer w50: 3160,4390 4280,4390 4415,4390 4566.54,4238.46 4800.04,4238.46 5042.17,4238.46 5131.85,4238.46
  Bottom Layer w20: v1(3155,4180) 3160,4185 3640,4185 v1(3750,4075) 3741.88,4075 3731.88,4085 v1(3450,4085) v1@3445,4085
pads on no net: J1.3 J1.MH1 J1.MH2 U1.5

## Polygon pours and split planes (outlines as drawn)
GND on Top Layer "GND_L01_P000" (solid, remove dead copper, pour order 0): 1000,1000 7000,1000 7000,5000 1000,5000

## Keep-outs
Keep-Out Layer:
  lines w10: 2610,3230 2610,3240 2610,4880 2640,4910 5620,4910 5720,4810 5720,1070 2770,1070 2610,1230 2610,3220 2610,3235

## Other copper
Top Layer:
  region: 185 vertices and 0 holes, not listed, extent 3980.67,2223.56 4026.89,2302.67
  region: 658 vertices and 2 holes, not listed, extent 3962,2132.89 4110.44,2277.78
  region: 211 vertices and 0 holes, not listed, extent 4045.56,2179.11 4122.89,2243.11
  region: 185 vertices and 0 holes, not listed, extent 4045.56,2223.56 4091.78,2302.67
  region: 217 vertices and 0 holes, not listed, extent 3949.56,2179.11 4026.89,2243.11
  region: 4027.78,2222.67 4026.89,2222.67 4026.89,2223.56 4027.78,2223.56
  region: 4045.56,2223.56 4045.56,2222.67 4044.67,2222.67 4044.67,2223.56
  pour cut-out: 3425,4015.96 3417.93,4015.96 3363.19,3961.22 3301.19,3961.22 3237.03,3897.06 3195.59,3897.06 3195.59,3889.88 3177.94,3889.88 3177.94,3835.87 3189.68,3835.87 3189.68,3746.54 3187.4,3744.25 3222.09,3744.25 3222.09,3669.13 3162.72,3669.13 3162.72,3407.28 3167.06,3402.94 3280.5,3402.94 3308.81,3431.25 3308.81,3711.25 3425,3827.44
  pour cut-out: 3302.94,4232.06 3480.5,4232.06 3528.06,4184.5 3528.06,4023.04 3476.49,4023.04 3474.55,4024.98 3474.55,4046.5 3435.56,4085.49 3377.22,4085.49 3365.44,4097.27 3360.17,4092.01 3325.44,4092.01 3325.44,4057.27 3312.73,4044.56 3337.29,4020 3370.42,4020 3384.93,4034.51 3414.44,4034.51 3414.44,4033.59 3425,4023.04 3363.19,3961.22 3301.19,3961.22
  pour cut-out: 4745.67,4278.81 5096.54,4278.81 5097.73,4280 5240,4280 5240,4620 5230,4630 5000,4630 5000,4629.37 4987.8,4617.17 4745.67,4617.17 4737.83,4625 4665,4625 4665,4525 4700,4525 4700,4290 4705,4285
  pour cut-out: 5211,3842.5 5201.22,3832.72 5201.22,3662.75 5210,3653.98 5210,3575 5215,3575 5211,3579
  pour cut-out: 5056.92,3807.06 5201.22,3662.75 5201.22,3832.72 5211,3842.5 5107.94,3842.5 5107.94,3840 5075,3807.06
  pour cut-out: 3779.13,4109.51 3779.13,4080.6 3827,4032.73 3827,3938.49 3851.94,3913.55 4037.96,3913.55 4041.51,3910 4041.51,3975.42 4092.49,3975.42 4092.49,3935.49 4254.16,3935.49 4259.88,3941.21 4259.88,4007.11 4298.12,4007.11 4305.45,4014.43 4305.45,4103.75 3784.89,4103.75
  pour cut-out: 3180.49,4349.65 4253.51,4349.65 4253.51,4166.57 4239.97,4153.02 3693.69,4153.02 3693.69,4142.47 3674.51,4123.28 3674.51,4023.04 3573.94,4023.04 3572.19,4024.78 3572.19,4202.78 3498.78,4276.19 3493.81,4271.22 3272.57,4271.22 3272.57,4268.75 3257.06,4253.25 3257.06,3979.5 3220.5,3942.94 3195.59,3942.94 3195.59,4015.02 3180.49,4030.12
  pour cut-out: 4060.62,1360.49 4320,1360.49 4320,1453.8 4248.12,1453.8 4238.76,1463.16 4238.76,1521.7 4236.81,1521.7 4144.77,1429.65 4090.84,1429.65 4055.62,1394.44 4060.62,1389.44
  pour cut-out: 4320.62,1458.54 4320,1457.92 4320,1360 4718.95,1360 4724.75,1365.8 4724.75,1471.45
  pour cut-out: 3425,3902.04 3425,3667.04 3822.96,3667.04 3661.19,3828.81 3491.22,3828.81
  text "nhile" at 4090.44,2110.44 h60

## Text inside footprints (layer, text, board x,y; h text height)
D1: Top Overlay "+" at 4038,2526.54 h30 r180
D2: Top Overlay "+" at 3813,2761.54 h30 r180
D3: Top Overlay "+" at 3583,2901.54 h30 r180
D4: Top Overlay "+" at 3363,2701.54 h30 r180
D5: Top Overlay "+" at 3243,2391.54 h30 r180
D6: Top Overlay "+" at 3331,1871.54 h30
D7: Top Overlay "+" at 3511,1631.54 h30
D8: Top Overlay "+" at 3751,1421.54 h30
D9: Top Overlay "+" at 4011,1261.54 h30
D10: Top Overlay "+" at 4271,1421.54 h30
D11: Top Overlay "+" at 4501,1631.54 h30
D12: Top Overlay "+" at 4691,1871.54 h30
D13: Top Overlay "+" at 4853,2391.54 h30 r180
D14: Top Overlay "+" at 4723,2691.54 h30 r180
D15: Top Overlay "+" at 4483,2891.54 h30 r180
D16: Top Overlay "+" at 4273,2751.54 h30 r180
U2: Top Overlay "*" at 3434,3584.04 h50 r90; Mechanical 13 "*" at 3434,3584.04 h50 r90
U3: Top Overlay "*" at 4818,3524.5 h50 r90; Mechanical 13 "*" at 4818,3524.5 h50 r90